# Altium PCB PICO_PCB_2ban.PcbDoc
Units mil, origin at the board's own origin, x right, y up, seen from the top; angles counter-clockwise.
Board outline 6000 x 4000 mil, 2 copper layers (Top Layer, Bottom Layer); 18 components, 14 nets, 50 pads, 0 vias.
Unrouted connection lines stored in the file: 27.
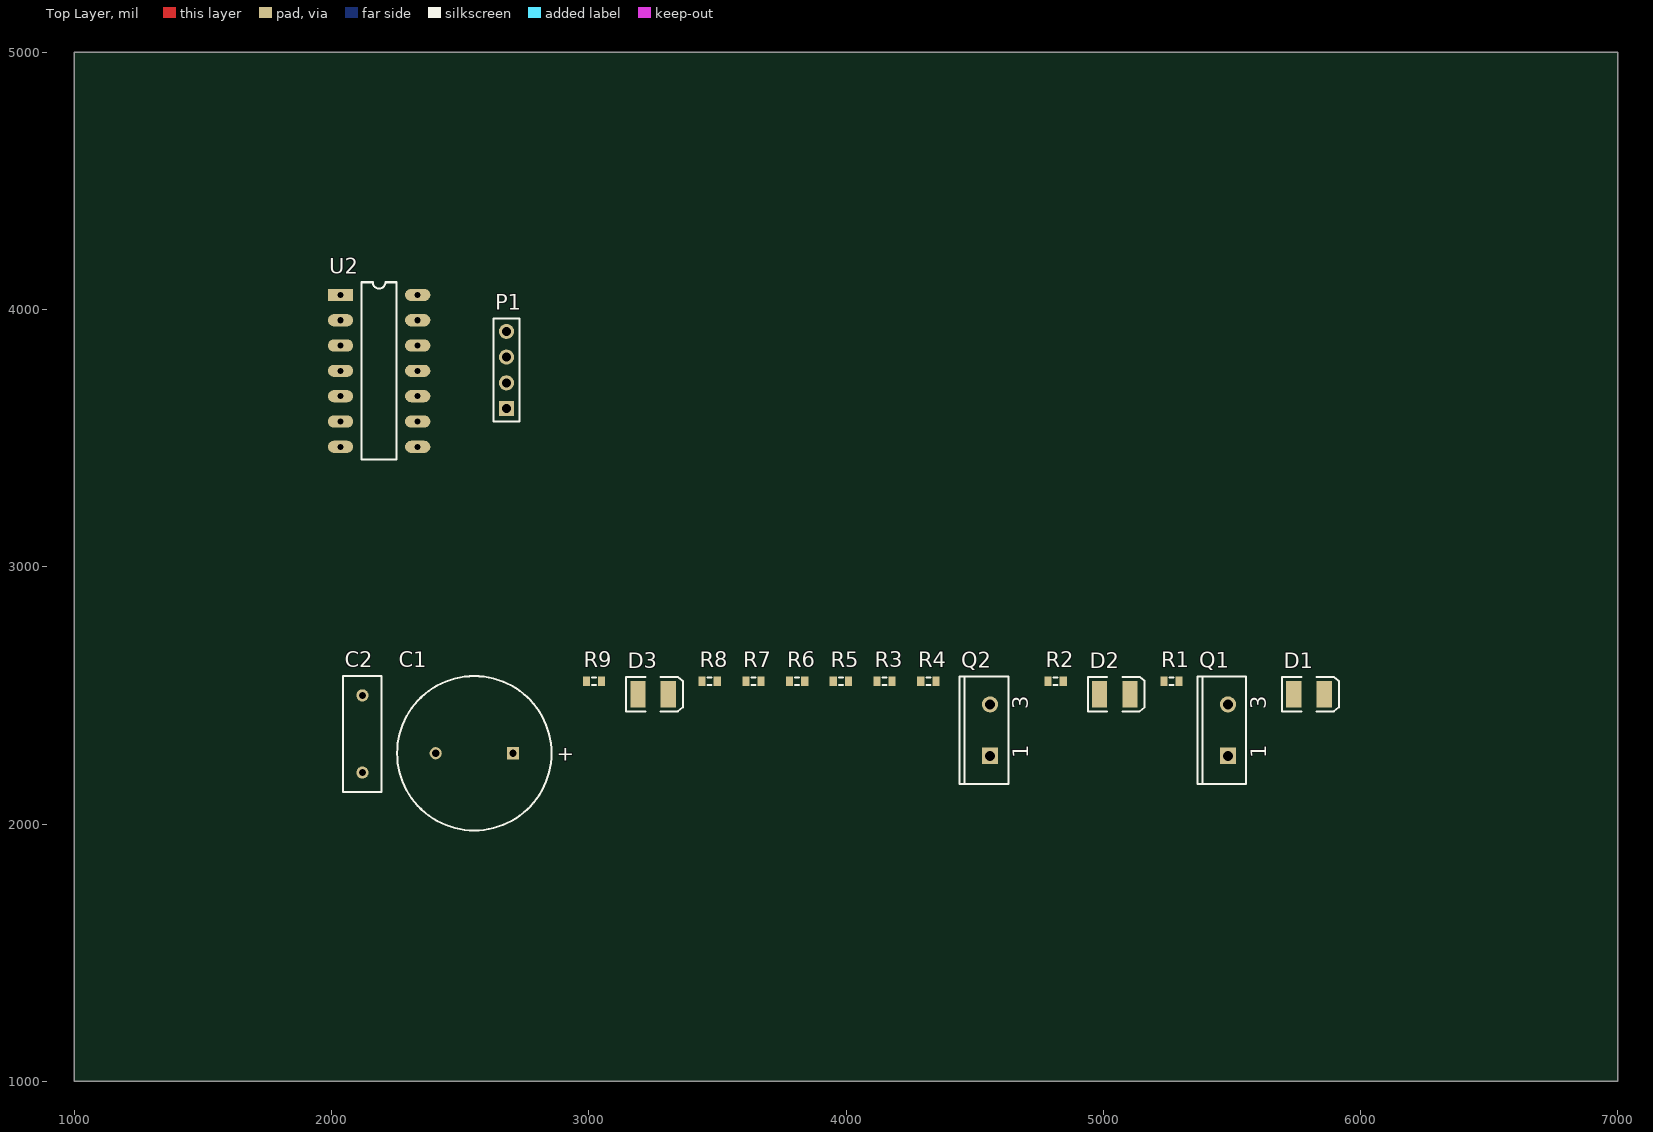
[diagram p0: Top Layer view]
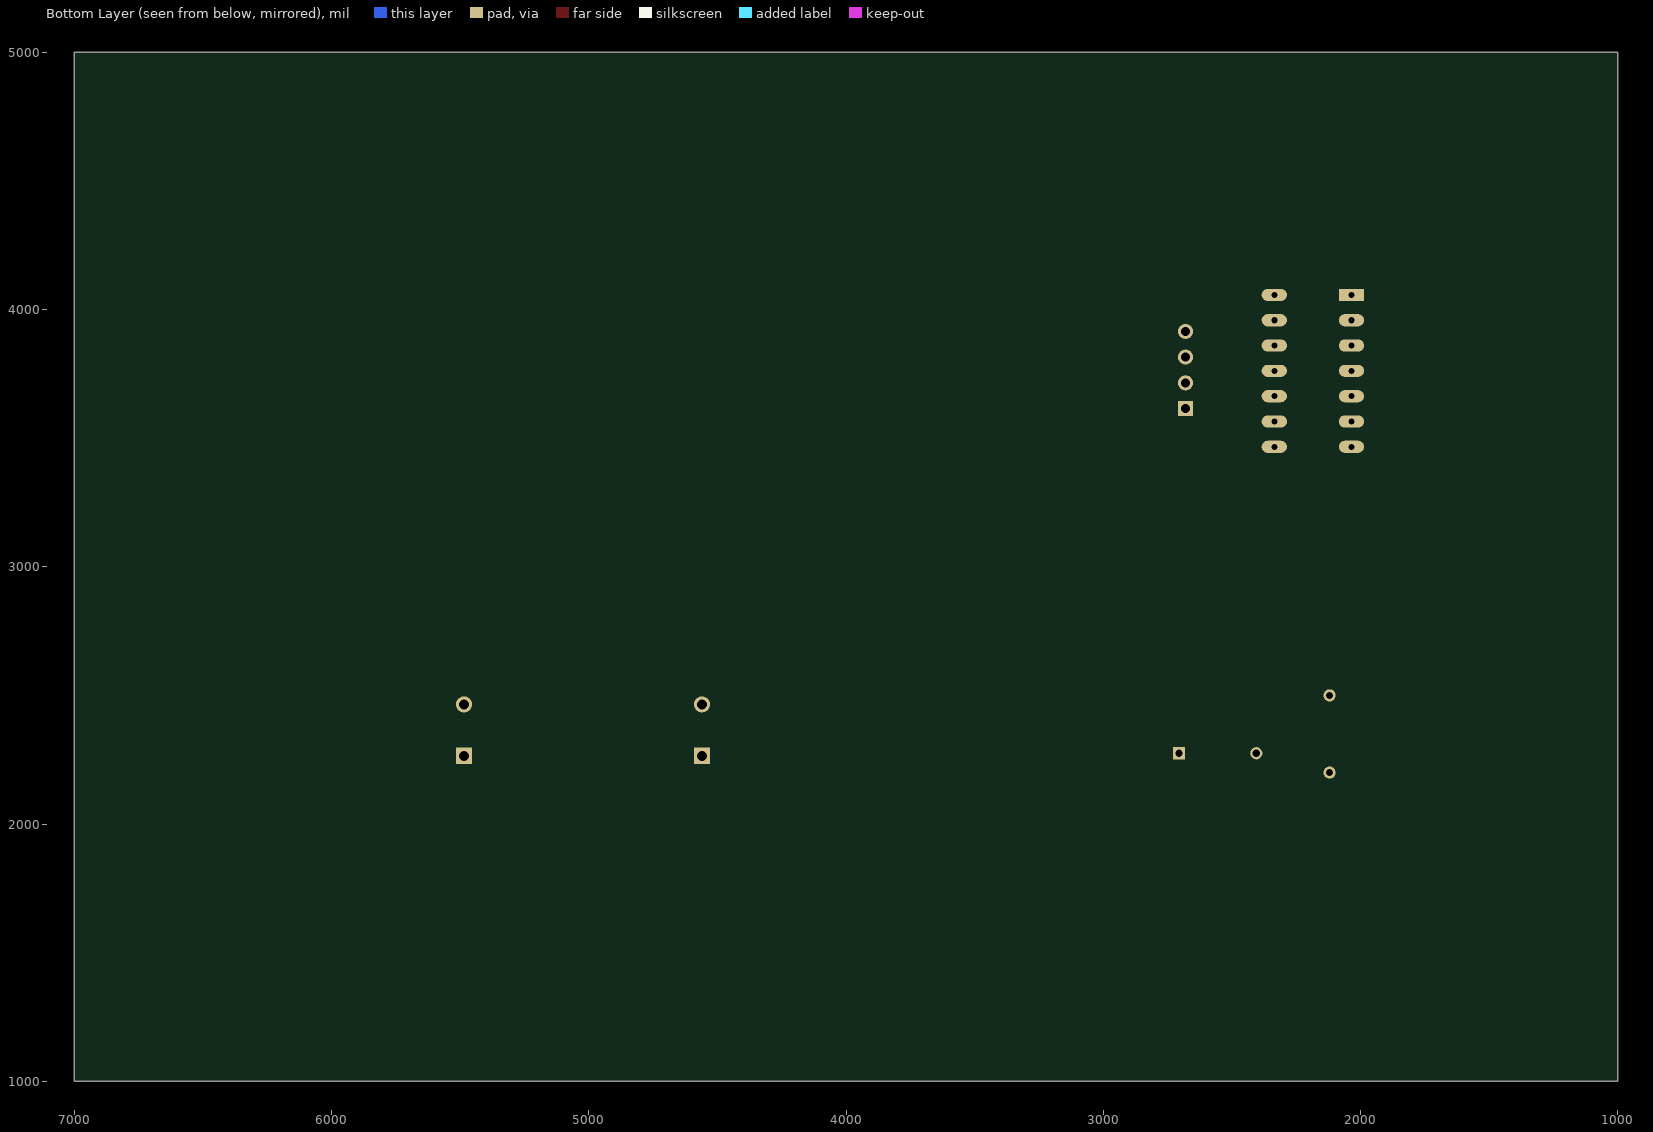
[diagram p1: Bottom Layer view, seen from below]

## Layer stack, top to bottom
Top Solder: solder mask 0.4, Solder Resist, Dk 3.5
Top Layer: signal copper 1.4
Dielectric 1: dielectric 12.6, FR-4, Dk 4.8
Bottom Layer: signal copper 1.4
Bottom Solder: solder mask 0.4, Solder Resist, Dk 3.5

## Board outline
1000,1000 7000,1000 7000,5000 1000,5000

## Design rules (kind name [scope] priority, off if disabled: settings)
Clearance [All] p1: gap=10 ignorepadtopadclearanceinfootprint=FALSE except(0: Arc-Hole Track-Hole SMDPad-Hole THPad-Hole Via-Hole Fill-Hole Poly-Hole Region-Hole Text-Hole)
PolygonConnect [All] p1: connectstyle=Relief reliefconductorwidth=10 reliefentries=4 polygonreliefangle="90 Angle" airgapwidth=10
RoutingVias [All] p1: holewidth=28 width=50 viastyle="Through Hole" minholewidth=28 minwidth=50 maxholewidth=28 maxwidth=50
SolderMaskExpansion [All] p1: expansion=4 istentingtop=FALSE
Width [All] p1: maxlimit=10 minlimit=10 preferedwidth=10
30 further rules are at their usual default settings.

## Classes and differential pairs
component class LM324: C1 C2 D1 D2 D3 Q1 Q2 R1 R2 R3 R4 R5 R6 R7 R8 R9 U2
component class MCU: P1

## Components (designator, comment, footprint, x,y, rotation, side; value= is the part's Value field where it differs from the comment)
C1 "Cap Pol1" RB7.6-15 2555,2275 r0 top value=100pF
C2 "Cap" RAD-0.3 2120,2350 r90 top value=100pF
D1 "LED3" 3.5X2.8X1.9 5800,2505 r0 top
D2 "LED3" 3.5X2.8X1.9 5045,2505 r0 top
D3 "LED3" 3.5X2.8X1.9 3250,2505 r0 top
P1 "Header 4" HDR1X4 2680,3615 r90 top
Q1 "Photo NPN" TO-220_A 5485,2365 r90 top
Q2 "Photo NPN" TO-220_A 4560,2365 r90 top
R1 "Res3" J1-0603 5265,2555 r0 top value=330
R2 "Res3" J1-0603 4815,2555 r0 top value=330
R3 "Res3" J1-0603 4150,2555 r0 top value=1M
R4 "Res3" J1-0603 4320,2555 r0 top value=1M
R5 "Res3" J1-0603 3980,2555 r0 top value=1K
R6 "Res3" J1-0603 3810,2555 r0 top value=1K
R7 "Res3" J1-0603 3640,2555 r0 top value=1K
R8 "Res3" J1-0603 3470,2555 r0 top value=1K
R9 "Res3" J1-0603 3020,2555 r0 top value=330
U2 "LM324" SOT27-1 2035,4056.85 r0 top

## Footprints (in the part's own frame and the unit in brackets; to place one, negate y for a bottom-side part, rotate by r counter-clockwise, add the part's x,y. Pads: shape width x height; smd on the part's side, far side on the other; paste and mask are expansions set on the pad)
3.5X2.8X1.9 [mm] "SM LED; 2 C-Bend Leads; Body 3.5 x 2.8 x 1.9 mm, inc leads (LxWxH typ)"
  rect 1.5x2.6 smd: 1(-1.5,0) 2(1.5,0)
  silkscreen extent -2.65,-1.7 2.95,1.7
HDR1X4 [mm] "Connector; Header; 4 Position"
  rect 1.5x1.5 hole 0.9: 1(0,0)
  round 1.5 hole 0.9: 2(2.54,0) 3(5.08,0) 4(7.62,0)
  silkscreen extent -1.27,-1.27 8.89,1.27
J1-0603 [mm] "Chip Resistor, Body 1.6x0.8mm, IPC High Density"
  rect 0.7x0.9 smd: 1(-0.75,0) 2(0.75,0)
  silkscreen extent -0.2,-0.35 0.2,0.35, body extent -0.85,-0.48 0.85,0.48, height 0.9
RAD-0.3 [mm] "Radial Cap, Thru-Hole; 2 Leads; 0.3 in Pin Spacing"
  round 1.2 hole 0.7: 1(-3.81,0) 2(3.81,0)
  silkscreen extent -5.71,-1.91 5.71,1.91
RB7.6-15 [mm] "Polarized Capacitor (Radial); 2 Leads"
  rect 1.2x1.2 hole 0.7: 1(3.81,0)
  round 1.2 hole 0.7: 2(-3.81,0)
  silkscreen extent -7.62,-7.62 7.62,7.62
SOT27-1 [mm]
  rect 2.5x1.2 hole 0.6: 1(0,0)
  oval 2.5x1.2 hole 0.6: 2(0,-2.5) 3(0,-5) 4(0,-7.5) 5(0,-10) 6(0,-12.5) 7(0,-15) 8(7.62,-15) 9(7.62,-12.5) 10(7.62,-10) 11(7.62,-7.5) 12(7.62,-5) 13(7.62,-2.5) 14(7.62,0)
  silkscreen extent 2.08,-16.25 5.54,1.25
TO-220_A [mm] "TO, Thru-Hole, Vertical, Heatsink Mounted; 3 In-Line Leads (1 Absent); Pitch 2.54 mm"
  rect 1.6x1.6 hole 1: 1(-2.54,0)
  round 1.6 hole 1: 3(2.54,0)
  silkscreen extent -5.3,-1.8 5.3,3

## Part data
C1: "Polarized Capacitor (Radial)", LatestRevisionDate=17-Jul-2002, LatestRevisionNote="Re-released for DXP Platform.", PackageDescription="Polarized Capacitor (Radial); 2 Leads", PackageReference=RB7.6-15, Published=8-Jun-2000, Publisher="Altium Limited"
C2: "Capacitor", LatestRevisionDate=17-Jul-2002, LatestRevisionNote="Re-released for DXP Platform.", PackageDescription="Radial Cap, Thru-Hole; 2 Leads; 0.3 in Pin Spacing", PackageReference=RAD-0.3, Published=8-Jun-2000, Publisher="Altium Limited"
D1 D2 D3: "Typical BLUE SiC LED", DatasheetVersion=16-Apr-2002, LatestRevisionDate=17-Dec-2003, LatestRevisionNote="PCB Footprint replaced.", PackageDescription="SM LED; 2 C-Bend Leads; Body 3.5 x 2.8 x 1.9 mm, inc leads (LxWxH typ)", PackageReference=3.5X2.8X1.9, PackageVersion=16-Apr-2002, Published=8-Jun-2000, Publisher="Altium Limited"
P1: "Header, 4-Pin", LatestRevisionDate=17-Jul-2002, LatestRevisionNote="Re-released for DXP Platform.", Publisher="Altium Limited"
Q1 Q2: "NPN Phototransistor", Code_JEDEC=TO-220-AC, LatestRevisionDate=17-Jul-2002, LatestRevisionNote="Re-released for DXP Platform.", PackageReference=TO-220_A, Published=24-Mar-1999, Publisher="Altium Limited"
R1 R2 R3 R4 R5 R6 R7 R8 R9: "Resistor", LatestRevisionDate=29-May-2009, LatestRevisionNote="IPC-7351 Footprint Added.", PackageDescription="Chip Resistor", PackageReference=J1-0603, Published=8-Jun-2000, Publisher="Altium Limited"

## Nets (pads, with @x,y where several pads share a name; then routed paths per layer and width w, separated by ;. In a path a pad name is that pad's centre, name@x,y a point inside that pad or via, vN(x,y) a via of type N, cw(c..) or ccw(c..) an arc to the next point about the centre after c; other vN are vias at no path point)
GND: C1.2 C2.1 R3.1 R4.1 R6.1 R7.1 R9.2 U2.11
"LT left rx": R1.2 R5.2 U2.1
"LT left sensor": U2.3
"LT left sensor rx": Q1.1 R3.2
"LT port3": D3.1
"LT right rx": R2.2 R8.2 U2.7
"LT right sensor rx": Q2.1 R4.2 U2.5
NetD1_2: D1.2 R1.1
NetD2_2: D2.2 R2.1
NetD3_2: D3.2 R9.1
NetP1_1: P1.1
NetR5_1: R5.1 R6.2 U2.2
NetR7_2: R7.2 R8.1 U2.6
VCC: C1.1 C2.2 D1.1 D2.1 Q1.3 Q2.3 U2.4
pads on no net: P1.2 P1.3 P1.4 U2.8 U2.9 U2.10 U2.12 U2.13 U2.14

## Text inside footprints (layer, text, board x,y; h text height)
C1: Top Overlay "+" at 2875.15,2245.99 h59.06
Q1: Top Overlay "3" at 5633.62,2445.32 h59.06 r90; Top Overlay "1" at 5633.62,2255.16 h59.06 r90
Q2: Top Overlay "3" at 4708.62,2445.32 h59.06 r90; Top Overlay "1" at 4708.62,2255.16 h59.06 r90